# Altium PCB PCB.PcbDoc
Units mil, origin at the board's own origin, x right, y up, seen from the top; angles counter-clockwise.
Board outline 6000 x 4000 mil, 2 copper layers (Top Layer, Bottom Layer); 223 components, 0 nets, 802 pads, 0 vias.
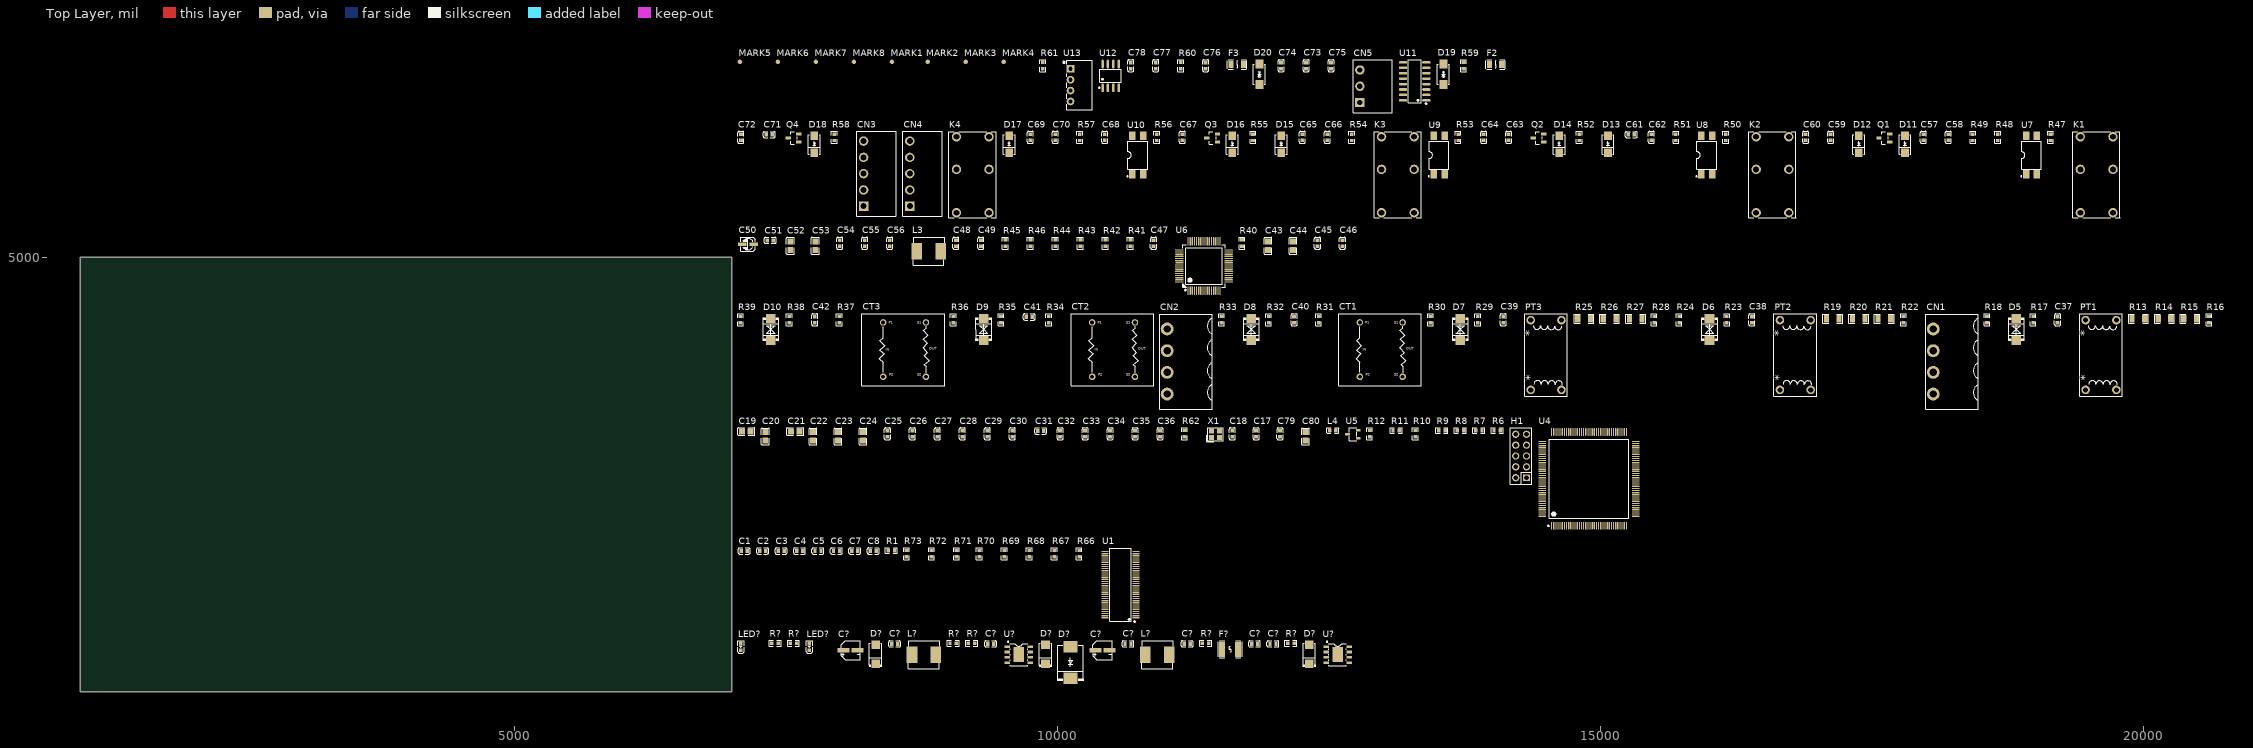
[diagram p0: Top Layer view]
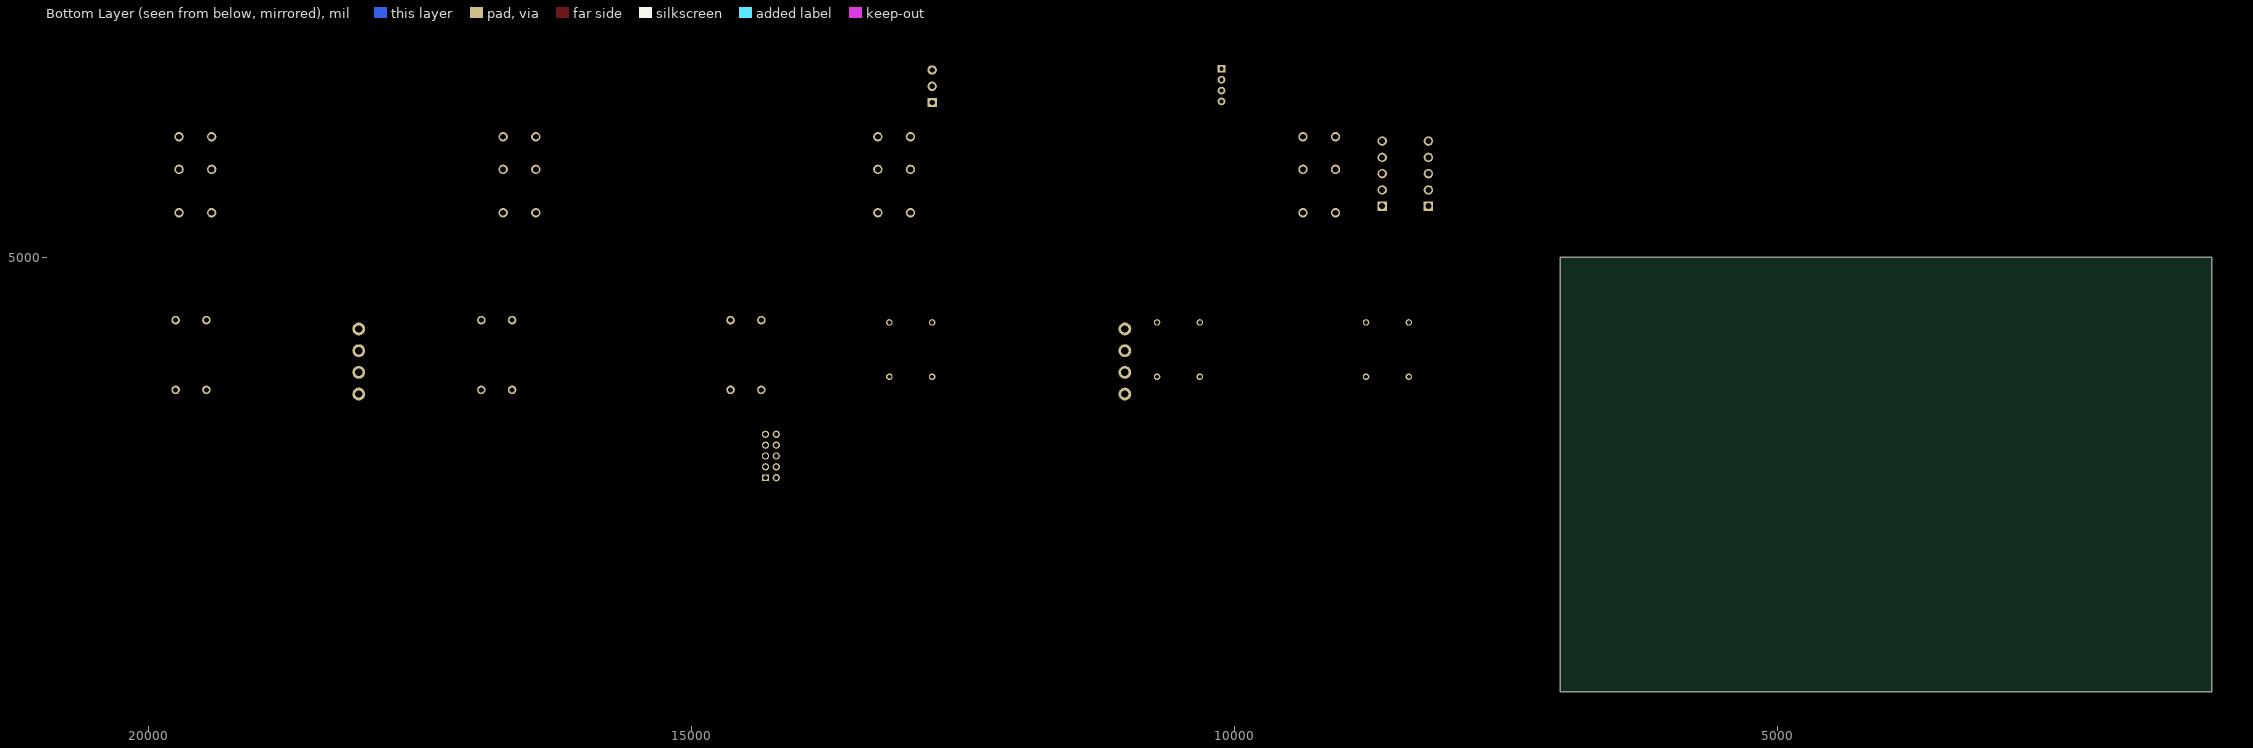
[diagram p1: Bottom Layer view, seen from below]

## Layer stack, top to bottom
Top Solder: solder mask 0.4, Solder Resist, Dk 3.5
Top Layer: signal copper 1.4
Dielectric 1: dielectric 12.6, FR-4, Dk 4.8
Bottom Layer: signal copper 1.4
Bottom Solder: solder mask 0.4, Solder Resist, Dk 3.5

## Board outline
1000,1000 7000,1000 7000,5000 1000,5000

## Design rules (kind name [scope] priority, off if disabled: settings)
Clearance [All] p1: gap=10 ignorepadtopadclearanceinfootprint=FALSE
PolygonConnect [All] p1: connectstyle=Relief reliefconductorwidth=10 reliefentries=4 polygonreliefangle="90 Angle" airgapwidth=10
RoutingVias [All] p1: holewidth=28 width=50 viastyle="Through Hole" minholewidth=28 minwidth=50 maxholewidth=28 maxwidth=50
SolderMaskExpansion [All] p1: expansion=4 istentingtop=FALSE
SupplyNets "Schematic Supply Nets_5" [InNet('+3.3V')] p1: voltage=0.000
SupplyNets "Schematic Supply Nets_4" [InNet('ISO_GND')] p2: voltage=0.000
SupplyNets "Schematic Supply Nets_3" [InNet('GND')] p3: voltage=0.000
SupplyNets "Schematic Supply Nets_2" [InNet('+5V')] p4: voltage=0.000
SupplyNets "Schematic Supply Nets_1" [InNet('AVDD5V')] p5: voltage=0.000
SupplyNets "Schematic Supply Nets" [InNet('ISO_VCC')] p6: voltage=0.000
Width [All] p1: maxlimit=10 minlimit=10 preferedwidth=10
30 further rules are at their usual default settings.

## Components (designator, comment, footprint, x,y, rotation, side; value= is the part's Value field where it differs from the comment)
C1 "100nF" C0603 7115,2295 r0 top
C2 "100nF" C0603 7285,2295 r0 top
C3 "100nF" C0603 7455,2295 r0 top
C4 "100nF" C0603 7625,2295 r0 top
C5 "100nF" C0603 7795,2295 r0 top
C6 "100nF" C0603 7965,2295 r0 top
C7 "100nF" C0603 8135,2295 r0 top
C8 "100nF" C0603 8305,2295 r0 top
C17 "100nF" C0603 11830,3375 r90 top
C18 "100nF" C0603 11610,3375 r90 top
C19 "10uF" C0805 7135,3395 r0 top
C20 "10uF" C0805 7310,3350 r90 top
C21 "10uF" C0805 7585,3395 r0 top
C22 "10uF" C0805 7750,3350 r90 top
C23 "10uF" C0805 7980,3350 r90 top
C24 "10uF" C0805 8210,3350 r90 top
C25 "100nF" C0603 8435,3375 r90 top
C26 "100nF" C0603 8665,3375 r90 top
C27 "100nF" C0603 8895,3375 r90 top
C28 "100nF" C0603 9125,3375 r90 top
C29 "100nF" C0603 9355,3375 r90 top
C30 "100nF" C0603 9585,3375 r90 top
C31 "100nF" C0603 9845,3400 r0 top
C32 "100nF" C0603 10025,3375 r90 top
C33 "100nF" C0603 10255,3375 r90 top
C34 "100nF" C0603 10485,3375 r90 top
C35 "100nF" C0603 10715,3375 r90 top
C36 "100nF" C0603 10945,3375 r90 top
C37 "10nF" C0603 19210,4425 r90 top
C38 "10nF" C0603 16395,4425 r90 top
C39 "10nF" C0603 14105,4425 r90 top
C40 "10nF" C0603 12180,4425 r90 top
C41 "10nF" C0603 9740,4450 r0 top
C42 "10nF" C0603 7765,4425 r90 top
C43 "10uF" C0805 11940,5105 r90 top
C44 "10uF" C0805 12170,5105 r90 top
C45 "1uF" C0603 12395,5130 r90 top
C46 "1uF" C0603 12625,5130 r90 top
C47 "100nF" C0603 10885,5130 r90 top
C48 "1nF" C0603 9065,5130 r90 top
C49 "1nF" C0603 9295,5130 r90 top
C50 "10uF" C_Ele_SMD_3x5.4mm 7150,5120 r0 top
C51 "100nF" C0603 7355,5155 r0 top
C52 "10uF" C0805 7540,5105 r90 top
C53 "10uF" C0805 7770,5105 r90 top
C54 "100nF" C0603 7995,5130 r90 top
C55 "100nF" C0603 8225,5130 r90 top
C56 "100nF" C0603 8455,5130 r90 top
C57 "100nF" C0603 17975,6105 r90 top
C58 "100nF" C0603 18205,6105 r90 top
C59 "100nF" C0603 17120,6105 r90 top
C60 "100nF" C0603 16890,6105 r90 top
C61 "100nF" C0603 15285,6130 r0 top
C62 "100nF" C0603 15470,6105 r90 top
C63 "100nF" C0603 14155,6105 r90 top
C64 "100nF" C0603 13925,6105 r90 top
C65 "100nF" C0603 12255,6105 r90 top
C66 "100nF" C0603 12485,6105 r90 top
C67 "100nF" C0603 11150,6105 r90 top
C68 "100nF" C0603 10435,6105 r90 top
C69 "100nF" C0603 9750,6105 r90 top
C70 "100nF" C0603 9980,6105 r90 top
C71 "100nF" C0603 7345,6130 r0 top
C72 "100nF" C0603 7085,6105 r90 top
C73 "100nF" C0603 12290,6765 r90 top
C74 "100nF" C0603 12060,6765 r90 top
C75 "100nF" C0603 12520,6765 r90 top
C76 "100nF" C0603 11365,6765 r90 top
C77 "100nF" C0603 10905,6765 r90 top
C78 "100nF" C0603 10675,6765 r90 top
C79 "100nF" C0603 12050,3375 r90 top
C80 "10uF" C0805 12285,3350 r90 top
C? "100nF" C0603 10650,1440 r0 top
C? "4.7uF" C0603 11815,1440 r0 top
C? "100nF" C0603 11985,1440 r0 top
C? "220uF" C_Ele_SMD_4x5.5mm 10410,1380 r0 top
C? "100nF" C0603 8500,1440 r0 top
C? "10nF" C0603 9385,1440 r0 top
C? "220uF" C_Ele_SMD_4x5.5mm 8090,1380 r0 top
C? "10nF" C0603 11195,1440 r0 top
CN1 "WJ2EDGRC-5.08-4P" CONN-TH_4P-P5.08_WJ2EDGRC-5.08-4P 18065,4040 r90 top
CN2 "WJ2EDGRC-5.08-4P" CONN-TH_4P-P5.08_WJ2EDGRC-5.08-4P 11010,4040 r90 top
CN3 "WJ15EDGRC-3.81-5P" CONN-TH_5P-P3.81_WJ15EDGRC-3.81-5P 8215,5770 r90 top
CN4 "WJ15EDGRC-3.81-5P" CONN-TH_5P-P3.81_WJ15EDGRC-3.81-5P 8640,5770 r90 top
CN5 "WJ15EDGRC-3.81-3P" CONN-TH_3P-P3.81_WJ15EDGRC-3.81-3P 12785,6575 r90 top
CT1 "DL-CT21C" DL-CT21C 12785,3900 r0 top
CT2 "DL-CT21C" DL-CT21C 10320,3900 r0 top
CT3 "DL-CT21C" DL-CT21C 8395,3900 r0 top
D5 "SMBJ12CA" SMB_L4.6-W3.6-LS5.3-BI 18830,4335 r90 top
D6 "SMBJ12CA" SMB_L4.6-W3.6-LS5.3-BI 16005,4335 r90 top
D7 "SMBJ12CA" SMB_L4.6-W3.6-LS5.3-BI 13710,4335 r90 top
D8 "SMBJ12CA" SMB_L4.6-W3.6-LS5.3-BI 11785,4335 r90 top
D9 "SMBJ12CA" SMB_L4.6-W3.6-LS5.3-BI 9320,4335 r90 top
D10 "SMBJ12CA" SMB_L4.6-W3.6-LS5.3-BI 7360,4335 r90 top
D11 "1N4007G" SMA_L4.4-W2.6-LS5.0-RD 17805,6040 r90 top
D12 "1N4007G" SMA_L4.4-W2.6-LS5.0-RD 17380,6040 r90 top
D13 "1N4007G" SMA_L4.4-W2.6-LS5.0-RD 15070,6040 r90 top
D14 "1N4007G" SMA_L4.4-W2.6-LS5.0-RD 14620,6040 r90 top
D15 "1N4007G" SMA_L4.4-W2.6-LS5.0-RD 12060,6040 r90 top
D16 "1N4007G" SMA_L4.4-W2.6-LS5.0-RD 11610,6040 r90 top
D17 "1N4007G" SMA_L4.4-W2.6-LS5.0-RD 9555,6040 r90 top
D18 "1N4007G" SMA_L4.4-W2.6-LS5.0-RD 7760,6040 r90 top
D19 "SMAJ15CA-E3/61" SMA_L4.3-W2.7-LS5.1-BI 13555,6685 r90 top
D20 "SMAJ15CA-E3/61" SMA_L4.3-W2.7-LS5.1-BI 11860,6685 r90 top
D? "SMDJ36A" SMC_L6.9-W5.9-LS7.9-RD 10120,1270 r90 top
D? "B340A" SMA_L4.3-W2.6-LS5.2-RD 8325,1345 r90 top
D? "B340A" SMA_L4.3-W2.6-LS5.2-RD 12320,1345 r90 top
D? "B340A" SMA_L4.3-W2.6-LS5.2-RD 9890,1345 r90 top
F2 "JK-NSMD050-30V" F1206 14035,6775 r0 top
F3 "JK-NSMD050-30V" F1206 11655,6775 r0 top
F? "mSMD050-60V" F1812 11590,1390 r0 top
H1 "" HDR-TH_10P-P2.54-V-F-R2-C5-S2.54 14270,3170 r90 top
K1 "DSP2A-DC5V" RELAY-TH_DSP2A-DC5V 19570,5760 r90 top
K2 "DSP2A-DC5V" RELAY-TH_DSP2A-DC5V 16585,5760 r90 top
K3 "DSP2A-DC5V" RELAY-TH_DSP2A-DC5V 13135,5760 r90 top
K4 "DSP2A-DC5V" RELAY-TH_DSP2A-DC5V 9220,5760 r90 top
L3 "15uH" IND-SMD_L7.1-W6.6_SLO0618H 8815,5055 r0 top
L4 "BLM18PG121SN1D" L0603 12535,3405 r0 top
L? "15uH" IND-SMD_L7.1-W6.6_SLO0618H 8770,1340 r0 top
L? "15uH" IND-SMD_L7.1-W6.6_SLO0618H 10920,1340 r0 top
LED? "" LED_0603 7085,1415 r90 top
LED? "" LED_0603 7715,1415 r90 top
MARK1 "" Mark-Point-1mm 8475,6800 r90 top
MARK2 "" Mark-Point-1mm 8805,6800 r90 top
MARK3 "" Mark-Point-1mm 9155,6800 r90 top
MARK4 "" Mark-Point-1mm 9505,6800 r90 top
MARK5 "" Mark-Point-1mm 7075,6800 r90 top
MARK6 "" Mark-Point-1mm 7425,6800 r90 top
MARK7 "" Mark-Point-1mm 7775,6800 r90 top
MARK8 "" Mark-Point-1mm 8125,6800 r90 top
PT1 "ZMPT107-1" XFMR-TH_ZMPT107-1 19610,4100 r90 top
PT2 "ZMPT107-1" XFMR-TH_ZMPT107-1 16795,4100 r90 top
PT3 "ZMPT107-1" XFMR-TH_ZMPT107-1 14500,4100 r90 top
Q1 "2N3904(SOT-23)" SOT-23-3_L2.9-W1.3-P1.90-LS2.4-TR 17615,6100 r0 top
Q2 "2N3904(SOT-23)" SOT-23-3_L2.9-W1.3-P1.90-LS2.4-TR 14430,6100 r0 top
Q3 "2N3904(SOT-23)" SOT-23-3_L2.9-W1.3-P1.90-LS2.4-TR 11425,6100 r0 top
Q4 "2N3904(SOT-23)" SOT-23-3_L2.9-W1.3-P1.90-LS2.4-TR 7570,6100 r0 top
R1 "4.7K" R0603 8470,2300 r0 top
R6 "100Ω" R0603 14050,3405 r0 top
R7 "100Ω" R0603 13880,3405 r0 top
R8 "100Ω" R0603 13710,3405 r0 top
R9 "100Ω" R0603 13540,3405 r0 top
R10 "4.7K" R0603 13295,3375 r90 top
R11 "4.7K" R0603 13120,3405 r0 top
R12 "4.7K" R0603 12875,3375 r90 top
R13 "100K" R1206 19955,4435 r0 top
R14 "100K" R1206 20195,4435 r0 top
R15 "100K" R1206 20430,4435 r0 top
R16 "1K" R0603 20605,4425 r90 top
R17 "2K" R0603 18985,4425 r90 top
R18 "1K" R0603 18560,4425 r90 top
R19 "100K" R1206 17140,4435 r0 top
R20 "100K" R1206 17380,4435 r0 top
R21 "100K" R1206 17615,4435 r0 top
R22 "1K" R0603 17790,4425 r90 top
R23 "2K" R0603 16165,4425 r90 top
R24 "1K" R0603 15725,4425 r90 top
R25 "100K" R1206 14850,4435 r0 top
R26 "100K" R1206 15085,4435 r0 top
R27 "100K" R1206 15325,4435 r0 top
R28 "1K" R0603 15495,4425 r90 top
R29 "2K" R0603 13870,4425 r90 top
R30 "1K" R0603 13435,4425 r90 top
R31 "1K" R0603 12405,4425 r90 top
R32 "500Ω" R0603 11945,4425 r90 top
R33 "1K" R0603 11510,4425 r90 top
R34 "1K" R0603 9920,4425 r90 top
R35 "500Ω" R0603 9480,4425 r90 top
R36 "1K" R0603 9040,4425 r90 top
R37 "1K" R0603 7990,4425 r90 top
R38 "500Ω" R0603 7530,4425 r90 top
R39 "1K" R0603 7080,4425 r90 top
R40 "1K" R0603 11700,5130 r90 top
R41 "1K" R0603 10670,5130 r90 top
R42 "1K" R0603 10440,5130 r90 top
R43 "1K" R0603 10210,5130 r90 top
R44 "1K" R0603 9980,5130 r90 top
R45 "1K" R0603 9520,5130 r90 top
R46 "1K" R0603 9750,5130 r90 top
R47 "2K" R0603 19145,6105 r90 top
R48 "5.1K" R0603 18660,6105 r90 top
R49 "330Ω" R0603 18430,6105 r90 top
R50 "2K" R0603 16155,6105 r90 top
R51 "5.1K" R0603 15695,6105 r90 top
R52 "330Ω" R0603 14805,6105 r90 top
R53 "2K" R0603 13690,6105 r90 top
R54 "5.1K" R0603 12710,6105 r90 top
R55 "330Ω" R0603 11800,6105 r90 top
R56 "2K" R0603 10915,6105 r90 top
R57 "5.1K" R0603 10205,6105 r90 top
R58 "330Ω" R0603 7945,6105 r90 top
R59 "33Ω" R0603 13740,6765 r90 top
R60 "33Ω" R0603 11135,6765 r90 top
R61 "DNP" R0603 9865,6765 r90 top
R62 "22Ω" R0603 11170,3375 r90 top
R66 "22Ω" R0603 10200,2270 r90 top
R67 "22Ω" R0603 9970,2270 r90 top
R68 "22Ω" R0603 9740,2270 r90 top
R69 "22Ω" R0603 9510,2270 r90 top
R70 "22Ω" R0603 9280,2270 r90 top
R71 "22Ω" R0603 9070,2270 r90 top
R72 "22Ω" R0603 8840,2270 r90 top
R73 "22Ω" R0603 8610,2270 r90 top
R? "3.24K" R0603 12150,1445 r0 top
R? "10K" R0603 11365,1445 r0 top
R? "1K" R0603 7400,1445 r0 top
R? "5.9K" R0603 9210,1445 r0 top
R? "1K" R0603 7570,1445 r0 top
R? "10K" R0603 9040,1445 r0 top
U1 "SN65MLVD080DGGR" TSSOP-64_L17.0-W6.1-P0.50-LS8.1-BL 10580,1985 r90 top
U4 "EPM570T144C3" TQFP-144_L20.0-W20.0-P0.50-LS22.0-BL 14895,2960 r0 top
U5 "IMP809ZEUR/T" SOT-23-3_L2.9-W1.6-P1.90-LS2.8-BR 12720,3370 r0 top
U6 "AD7606BSTZ" LQFP-64_L10.0-W10.0-P0.50-LS12.0-BL 11350,4920 r0 top
U7 "FOD817DSD" SMD-4_L4.6-W6.4-P2.54-LS10.0-BL 18970,5940 r0 top
U8 "FOD817DSD" SMD-4_L4.6-W6.4-P2.54-LS10.0-BL 15980,5940 r0 top
U9 "FOD817DSD" SMD-4_L4.6-W6.4-P2.54-LS10.0-BL 13515,5940 r0 top
U10 "FOD817DSD" SMD-4_L4.6-W6.4-P2.54-LS10.0-BL 10740,5940 r0 top
U11 "MAX3232ID" SOIC-16_L9.9-W3.9-P1.27-LS6.0-BL 13290,6620 r90 top
U12 "ADUM1201ARZ-RL7" SOIC-8_L4.9-W3.9-P1.27-LS6.0-BL 10490,6670 r0 top
U13 "B0505S-1WR2" PWRM-TH_BXXXXS-1WR2 10120,6585 r90 top
U? "TPS5430DDAR" ESOP-8_L4.9-W3.9-P1.27-LS6.0-TL-EP 12580,1340 r0 top
U? "TPS5430DDAR" ESOP-8_L4.9-W3.9-P1.27-LS6.0-TL-EP 9645,1340 r0 top
X1 "25MHz" OSC-SMD_4P-L2.5-W2.0-BL 11455,3370 r0 top

## Footprints (in the part's own frame and the unit in brackets; to place one, negate y for a bottom-side part, rotate by r counter-clockwise, add the part's x,y. Pads: shape width x height; smd on the part's side, far side on the other; paste and mask are expansions set on the pad)
C0603 [mm]
  rect 0.8x0.9 smd: 1(-0.7,0) 2(0.7,0)
  silkscreen extent -1.41,-0.71 1.39,0.72
C0805 [mm]
  rect 1.41x1.35 smd paste-100 mask+0.051: 1(-1,0) 2(1,0)
  silkscreen extent -1.96,-0.9 1.96,0.9
C_Ele_SMD_3x5.4mm [mil]
  rect 78.7x31.5 smd paste+0 mask+2: 1(54.1,-0.55) 2(-53.7,-0.55)
  silkscreen extent -65,-65 65,65
C_Ele_SMD_4x5.5mm [mm]
  rect 2.8x1.1 smd paste+0 mask+0.051: 1(-1.543,0) 2(1.778,0)
  silkscreen extent -2.1,-2.23 2.35,2.23
CONN-TH_3P-P3.81_WJ15EDGRC-3.81-3P [mm]
  rect 2.2x2.2 hole 1.26: 1(-3.81,0)
  round 2.2 hole 1.26: 2(0,0) 3(3.81,0)
  silkscreen extent -6.15,-7.55 6.15,1.6
CONN-TH_4P-P5.08_WJ2EDGRC-5.08-4P [mm]
  round 3 hole 1.7: 1(-7.62,0) 2(-2.54,0) 3(2.54,0) 4(7.62,0)
  silkscreen extent -11.11,-10.5 11.11,1.7
CONN-TH_5P-P3.81_WJ15EDGRC-3.81-5P [mm]
  rect 2.2x2.2 hole 1.4: 1(-7.62,0)
  round 2.2 hole 1.4: 2(-3.81,0) 3(0,0) 4(3.81,0) 5(7.62,0)
  silkscreen extent -9.91,-7.62 9.91,1.6
DL-CT21C [mil]
  round 60 hole 36: 1(0,500) 2(0,0) 3(393.7,500) 4(393.7,0)
  silkscreen extent -195,-81 565,580
ESOP-8_L4.9-W3.9-P1.27-LS6.0-TL-EP [mm]
  rect 1.3x0.6 smd: 1(-2.7,1.905) 2(-2.7,0.635) 3(-2.7,-0.635) 4(-2.7,-1.905) 5(2.7,-1.905) 6(2.7,-0.635) 7(2.7,0.635) 8(2.7,1.905)
  rect 2.5x3.5 smd: 9(0,0)
  silkscreen extent -2.67,-2.55 2.05,3.2
F1206 [mm]
  rect 1.19x1.728 smd: 1(-1.445,0) 2(1.445,0)
  silkscreen extent -2.27,-1.09 2.27,1.09
F1812 [mil]
  rect 55.38x137.76 smd paste-3937.01 mask+2: 1(-72.97,0) 2(72.97,0)
  silkscreen extent -110,-80 110,80
HDR-TH_10P-P2.54-V-F-R2-C5-S2.54 [mm]
  rect 1.575x1.7 hole 1.1: 1(-5.08,-1.27)
  round 1.7 hole 1.1: 2(-5.08,1.27) 3(-2.54,-1.27) 4(-2.54,1.27) 5(0,-1.27) 6(0,1.27) 7(2.54,-1.27) 8(2.54,1.27) 9(5.08,-1.27) 10(5.08,1.27)
  silkscreen extent -6.6,-2.54 6.6,2.54
IND-SMD_L7.1-W6.6_SLO0618H [mm]
  rect 2.5x3.8 smd: 1(-2.8,0) 2(2.8,0)
  silkscreen extent -3.68,-3.3 3.68,3.3
L0603 [mm]
  rect 0.8x0.864 smd paste-100 mask+0.051: 1(-0.7,0) 2(0.7,0)
  silkscreen extent -1.42,-0.65 1.42,0.65
LED_0603 [mil]
  rect 31.5x31.5 smd paste+0 mask+2: 1(-33.5,-0.4) 2(29.5,-0.2)
  silkscreen extent -61,-30 53,30
LQFP-64_L10.0-W10.0-P0.50-LS12.0-BL [mm]
  oval 0.3x2 smd: 1(-3.75,-5.75) 2(-3.25,-5.75) 3(-2.75,-5.75) 4(-2.25,-5.75) 5(-1.75,-5.75) 6(-1.25,-5.75) 7(-0.75,-5.75) 8(-0.25,-5.75) 9(0.25,-5.75) 10(0.75,-5.75) 11(1.25,-5.75) 12(1.75,-5.75) 13(2.25,-5.75) 14(2.75,-5.75) 15(3.25,-5.75) 16(3.75,-5.75) 33(3.75,5.75) 34(3.25,5.75) 35(2.75,5.75) 36(2.25,5.75) 37(1.75,5.75) 38(1.25,5.75) 39(0.75,5.75) 40(0.25,5.75) 41(-0.25,5.75) 42(-0.75,5.75) 43(-1.25,5.75) 44(-1.75,5.75) 45(-2.25,5.75) 46(-2.75,5.75) 47(-3.25,5.75) 48(-3.75,5.75)
  oval 2x0.3 smd: 17(5.75,-3.75) 18(5.75,-3.25) 19(5.75,-2.75) 20(5.75,-2.25) 21(5.75,-1.75) 22(5.75,-1.25) 23(5.75,-0.75) 24(5.75,-0.25) 25(5.75,0.25) 26(5.75,0.75) 27(5.75,1.25) 28(5.75,1.75) 29(5.75,2.25) 30(5.75,2.75) 31(5.75,3.25) 32(5.75,3.75) 49(-5.75,3.75) 50(-5.75,3.25) 51(-5.75,2.75) 52(-5.75,2.25) 53(-5.75,1.75) 54(-5.75,1.25) 55(-5.75,0.75) 56(-5.75,0.25) 57(-5.75,-0.25) 58(-5.75,-0.75) 59(-5.75,-1.25) 60(-5.75,-1.75) 61(-5.75,-2.25) 62(-5.75,-2.75) 63(-5.75,-3.25) 64(-5.75,-3.75)
  silkscreen extent -5,-5.79 5,5
Mark-Point-1mm [mm]
  round 1 smd paste-25.4 mask+0.051: 1(0,0)
OSC-SMD_4P-L2.5-W2.0-BL [mm]
  rect 1.2x1.1 smd: 1(-0.95,-0.75) 2(0.95,-0.75) 3(0.95,0.75) 4(-0.95,0.75)
  silkscreen extent -2.01,-1.76 1.78,1.53
PWRM-TH_BXXXXS-1WR2 [mm]
  rect 1.8x1.8 hole 1: 1(3.81,0)
  round 1.8 hole 1: 2(1.27,0) 3(-1.27,0) 4(-3.81,0)
  silkscreen extent -5.8,-5.1 5.8,1.72
R0603 [mil]
  rect 31.75x34.02 smd paste-3937.01 mask+2: 1(-29.66,0) 2(29.66,0)
  silkscreen extent -55,-26 55,26
R1206 [mil]
  rect 47.54x66.97 smd paste-3937.01 mask+2: 1(-58.22,0) 2(58.22,0)
  silkscreen extent -91,-42 91,42
RELAY-TH_DSP2A-DC5V [mm]
  round 2.2 hole 1.4: 1(-8.89,-3.81) 5(1.27,-3.81) 8(8.89,-3.81) 9(8.89,3.81) 12(1.27,3.81) 16(-8.89,3.81)
  silkscreen extent -10.11,-5.51 10.09,5.56
SMA_L4.3-W2.6-LS5.2-RD [mm]
  rect 2x2 smd: 1(-2.2,0) 2(2.2,0)
  silkscreen extent -2.98,-1.5 2.6,1.5
SMA_L4.3-W2.7-LS5.1-BI [mm]
  rect 2.1x1.8 smd: 1(-2.4,0) 2(2.4,0)
  silkscreen extent -2.3,-1.35 2.3,1.45
SMA_L4.4-W2.6-LS5.0-RD [mm]
  rect 2x1.8 smd paste+0 mask+0.102: 1(-2,0) 2(2,0)
  silkscreen extent -2.3,-1.4 2.3,1.4
SMB_L4.6-W3.6-LS5.3-BI [mil]
  rect 80.61x88.23 smd: 1(-102.02,0) 2(102.01,0)
  silkscreen extent -105,-75 108,75
SMC_L6.9-W5.9-LS7.9-RD [mm]
  rect 2.7x3.3 smd: 1(-3.686,0) 2(3.686,0)
  silkscreen extent -4.36,-3.1 3.98,3.1
SMD-4_L4.6-W6.4-P2.54-LS10.0-BL [mm]
  rect 1.5x2 smd: 1(-1.27,-4.5) 2(1.27,-4.5) 3(1.27,4.5) 4(-1.27,4.5)
  silkscreen extent -2.54,-5.08 2.3,3.3
SOIC-8_L4.9-W3.9-P1.27-LS6.0-BL [mm]
  oval 0.588x2.045 smd: 1(-1.905,-2.772) 2(-0.635,-2.772) 3(0.635,-2.772) 4(1.905,-2.772) 5(1.905,2.772) 6(0.635,2.772) 7(-0.635,2.772) 8(-1.905,2.772)
  silkscreen extent -2.8,-2.92 2.53,1.52
SOIC-16_L9.9-W3.9-P1.27-LS6.0-BL [mil]
  oval 23.7x77.6 smd: 1(-175,-107.7) 2(-125,-107.7) 3(-75,-107.7) 4(-25,-107.7) 5(25,-107.7) 6(75,-107.7) 7(125,-107.7) 8(175,-107.7) 9(175,107.7) 10(125,107.7) 11(75,107.7) 12(25,107.7) 13(-25,107.7) 14(-75,107.7) 15(-125,107.7) 16(-175,107.7)
  silkscreen extent -211,-111 198,60
SOT-23-3_L2.9-W1.3-P1.90-LS2.4-TR [mm]
  rect 1.25x0.7 smd: 1(1.25,0.95) 2(1.25,-0.95) 3(-1.25,0)
  silkscreen extent -0.65,-1.46 0.9,1.46
SOT-23-3_L2.9-W1.6-P1.90-LS2.8-BR [mm]
  rect 1.07x0.6 smd: 1(1.235,-0.95) 2(1.235,0.95) 3(-1.235,0)
  silkscreen extent -0.88,-1.54 0.88,1.54
TQFP-144_L20.0-W20.0-P0.50-LS22.0-BL [mm]
  oval 0.28x1.8 smd: 1(-8.75,-10.95) 2(-8.25,-10.95) 3(-7.75,-10.95) 4(-7.25,-10.95) 5(-6.75,-10.95) 6(-6.25,-10.95) 7(-5.75,-10.95) 8(-5.25,-10.95) 9(-4.75,-10.95) 10(-4.25,-10.95) 11(-3.75,-10.95) 12(-3.25,-10.95) 13(-2.75,-10.95) 14(-2.25,-10.95) 15(-1.75,-10.95) 16(-1.25,-10.95) 17(-0.75,-10.95) 18(-0.25,-10.95) 19(0.25,-10.95) 20(0.75,-10.95) 21(1.25,-10.95) 22(1.75,-10.95) 23(2.25,-10.95) 24(2.75,-10.95) 25(3.25,-10.95) 26(3.75,-10.95) 27(4.25,-10.95) 28(4.75,-10.95) 29(5.25,-10.95) 30(5.75,-10.95) 31(6.25,-10.95) 32(6.75,-10.95) 33(7.25,-10.95) 34(7.75,-10.95) 35(8.25,-10.95) 36(8.75,-10.95) 73(8.75,10.95) 74(8.25,10.95) 75(7.75,10.95) 76(7.25,10.95) 77(6.75,10.95) 78(6.25,10.95) 79(5.75,10.95) 80(5.25,10.95) 81(4.75,10.95) 82(4.25,10.95) 83(3.75,10.95) 84(3.25,10.95) 85(2.75,10.95) 86(2.25,10.95) 87(1.75,10.95) 88(1.25,10.95) 89(0.75,10.95) 90(0.25,10.95) 91(-0.25,10.95) 92(-0.75,10.95) 93(-1.25,10.95) 94(-1.75,10.95) 95(-2.25,10.95) 96(-2.75,10.95) 97(-3.25,10.95) 98(-3.75,10.95) 99(-4.25,10.95) 100(-4.75,10.95) 101(-5.25,10.95) 102(-5.75,10.95) 103(-6.25,10.95) 104(-6.75,10.95) 105(-7.25,10.95) 106(-7.75,10.95) 107(-8.25,10.95) 108(-8.75,10.95)
  oval 1.8x0.28 smd: 37(10.95,-8.75) 38(10.95,-8.25) 39(10.95,-7.75) 40(10.95,-7.25) 41(10.95,-6.75) 42(10.95,-6.25) 43(10.95,-5.75) 44(10.95,-5.25) 45(10.95,-4.75) 46(10.95,-4.25) 47(10.95,-3.75) 48(10.95,-3.25) 49(10.95,-2.75) 50(10.95,-2.25) 51(10.95,-1.75) 52(10.95,-1.25) 53(10.95,-0.75) 54(10.95,-0.25) 55(10.95,0.25) 56(10.95,0.75) 57(10.95,1.25) 58(10.95,1.75) 59(10.95,2.25) 60(10.95,2.75) 61(10.95,3.25) 62(10.95,3.75) 63(10.95,4.25) 64(10.95,4.75) 65(10.95,5.25) 66(10.95,5.75) 67(10.95,6.25) 68(10.95,6.75) 69(10.95,7.25) 70(10.95,7.75) 71(10.95,8.25) 72(10.95,8.75) 109(-10.95,8.75) 110(-10.95,8.25) 111(-10.95,7.75) 112(-10.95,7.25) 113(-10.95,6.75) 114(-10.95,6.25) 115(-10.95,5.75) 116(-10.95,5.25) 117(-10.95,4.75) 118(-10.95,4.25) 119(-10.95,3.75) 120(-10.95,3.25) 121(-10.95,2.75) 122(-10.95,2.25) 123(-10.95,1.75) 124(-10.95,1.25) 125(-10.95,0.75) 126(-10.95,0.25) 127(-10.95,-0.25) 128(-10.95,-0.75) 129(-10.95,-1.25) 130(-10.95,-1.75) 131(-10.95,-2.25) 132(-10.95,-2.75) 133(-10.95,-3.25) 134(-10.95,-3.75) 135(-10.95,-4.25) 136(-10.95,-4.75) 137(-10.95,-5.25) 138(-10.95,-5.75) 139(-10.95,-6.25) 140(-10.95,-6.75) 141(-10.95,-7.25) 142(-10.95,-7.75) 143(-10.95,-8.25) 144(-10.95,-8.75)
  silkscreen extent -9.65,-11.15 9.25,9.25
TSSOP-64_L17.0-W6.1-P0.50-LS8.1-BL [mm]
  oval 0.28x1.67 smd: 1(-7.75,-3.63) 2(-7.25,-3.63) 3(-6.75,-3.63) 4(-6.25,-3.63) 5(-5.75,-3.63) 6(-5.25,-3.63) 7(-4.75,-3.63) 8(-4.25,-3.63) 9(-3.75,-3.63) 10(-3.25,-3.63) 11(-2.75,-3.63) 12(-2.25,-3.63) 13(-1.75,-3.63) 14(-1.25,-3.63) 15(-0.75,-3.63) 16(-0.25,-3.63) 17(0.25,-3.63) 18(0.75,-3.63) 19(1.25,-3.63) 20(1.75,-3.63) 21(2.25,-3.63) 22(2.75,-3.63) 23(3.25,-3.63) 24(3.75,-3.63) 25(4.25,-3.63) 26(4.75,-3.63) 27(5.25,-3.63) 28(5.75,-3.63) 29(6.25,-3.63) 30(6.75,-3.63) 31(7.25,-3.63) 32(7.75,-3.63) 33(7.75,3.63) 34(7.25,3.63) 35(6.75,3.63) 36(6.25,3.63) 37(5.75,3.63) 38(5.25,3.63) 39(4.75,3.63) 40(4.25,3.63) 41(3.75,3.63) 42(3.25,3.63) 43(2.75,3.63) 44(2.25,3.63) 45(1.75,3.63) 46(1.25,3.63) 47(0.75,3.63) 48(0.25,3.63) 49(-0.25,3.63) 50(-0.75,3.63) 51(-1.25,3.63) 52(-1.75,3.63) 53(-2.25,3.63) 54(-2.75,3.63) 55(-3.25,3.63) 56(-3.75,3.63) 57(-4.25,3.63) 58(-4.75,3.63) 59(-5.25,3.63) 60(-5.75,3.63) 61(-6.25,3.63) 62(-6.75,3.63) 63(-7.25,3.63) 64(-7.75,3.63)
  silkscreen extent -8.79,-3.45 8.58,2.49
XFMR-TH_ZMPT107-1 [mm]
  round 2 hole 1.2: 1(-8.15,3.6) 2(-8.15,-3.6) 3(8.15,3.6) 4(8.15,-3.6)
  silkscreen extent -9.6,-5 9.6,5

## Part data
C1 C2 C3 C4 C5 C6 C7 C8 C17 C18 C25 C26 C27 C28 C29 C30 C31 C32 C33 C34 C35 C36 C37 C38 C39 C40 C41 C42 C45 C46 C47 C48 C49 C51 C54 C55 C56 C57 C58 C59 C60 C61 C62 C63 C64 C65 C66 C67 C68 C69 C70 C71 C72 C73 C74 C75 C76 C77 C78 C79 C? C? C? C? C? C?: library part CAP_0603, Device=CAP_0603
C19 C20 C21 C22 C23 C24 C43 C44 C52 C53 C80: library part CAP_0805, Device=CAP_0805
C50: library part C_Ele_SMD_3x5.4mm, Device=C_Ele_SMD_3x5.4mm
C? C?: library part C_Ele_SMD_4x5.5mm, Device=C_Ele_SMD_4x5.5mm
H1: library part HDR-F_2.54_2x5, Device=HDR-F_2.54_2x5
L3 L? L?: library part SLO0630H150MTT, Device=SLO0630H150MTT
LED? LED?: library part LED_0603-R, Device=LED_0603-R
MARK1 MARK2 MARK3 MARK4 MARK5 MARK6 MARK7 MARK8: library part Mark-Point, Device=Mark-Point
PT1 PT2 PT3: library part ZMPT107-1_C125191, Device=ZMPT107-1_C125191
Q1 Q2 Q3 Q4: library part 2n3904S-RTK/PS, Device=2n3904S-RTK/PS
R1 R6 R7 R8 R9 R10 R11 R12 R16 R17 R18 R22 R23 R24 R28 R29 R30 R31 R32 R33 R34 R35 R36 R37 R38 R39 R40 R41 R42 R43 R44 R45 R46 R47 R48 R49 R50 R51 R52 R53 R54 R55 R56 R57 R58 R59 R60 R61 R62 R66 R67 R68 R69 R70 R71 R72 R73 R? R? R? R? R? R?: library part Res_0603, Device=Res_0603
R13 R14 R15 R19 R20 R21 R25 R26 R27: library part Res_1206, Device=Res_1206
X1: library part X1G0041710033, Device=X1G0041710033
CN1 CN2: Device=WJ2EDGRC-5.08-4P
CN3 CN4: Device=WJ15EDGRC-3.81-5P
CN5: Device=WJ15EDGRC-3.81-3P
CT1 CT2 CT3: Device=DL-CT21C
D5 D6 D7 D8 D9 D10: Device=SMBJ12CA
D11 D12 D13 D14 D15 D16 D17 D18: Device=1N4007G
D19 D20: Device=SMAJ15CA-E3/61
D?: Device=SMDJ36A
D? D? D?: Device=B340A
F2 F3: Device=JK-NSMD050-30V
F?: Device=mSMD050-60V
K1 K2 K3 K4: Device=DSP2A-DC5V
L4: Device=BLM18PG121SN1D
U1: Device=SN65MLVD080DGGR
U4: Device=EPM570T144C3
U5: Device=IMP809ZEUR/T
U6: Device=AD7606BSTZ
U7 U8 U9 U10: Device=FOD817DSD
U11: Device=MAX3232ID
U12: Device=ADUM1201ARZ-RL7
U13: Device=B0505S-1WR2
U? U?: Device=TPS5430DDAR

## Nets (pads, with @x,y where several pads share a name; then routed paths per layer and width w, separated by ;. In a path a pad name is that pad's centre, name@x,y a point inside that pad or via, vN(x,y) a via of type N, cw(c..) or ccw(c..) an arc to the next point about the centre after c; other vN are vias at no path point)
pads on no net: C1.1 C1.2 C2.1 C2.2 C3.1 C3.2 C4.1 C4.2 C5.1 C5.2 C6.1 C6.2 C7.1 C7.2 C8.1 C8.2 C17.1 C17.2 C18.1 C18.2 C19.1 C19.2 C20.1 C20.2 C21.1 C21.2 C22.1 C22.2 C23.1 C23.2 C24.1 C24.2 C25.1 C25.2 C26.1 C26.2 C27.1 C27.2 C28.1 C28.2 C29.1 C29.2 C30.1 C30.2 C31.1 C31.2 C32.1 C32.2 C33.1 C33.2 C34.1 C34.2 C35.1 C35.2 C36.1 C36.2 C37.1 C37.2 C38.1 C38.2 C39.1 C39.2 C40.1 C40.2 C41.1 C41.2 C42.1 C42.2 C43.1 C43.2 C44.1 C44.2 C45.1 C45.2 C46.1 C46.2 C47.1 C47.2 C48.1 C48.2 C49.1 C49.2 C50.1 C50.2 C51.1 C51.2 C52.1 C52.2 C53.1 C53.2 C54.1 C54.2 C55.1 C55.2 C56.1 C56.2 C57.1 C57.2 C58.1 C58.2 C59.1 C59.2 C60.1 C60.2 C61.1 C61.2 C62.1 C62.2 C63.1 C63.2 C64.1 C64.2 C65.1 C65.2 C66.1 C66.2 C67.1 C67.2 C68.1 C68.2 C69.1 C69.2 C70.1 C70.2 C71.1 C71.2 C72.1 C72.2 C73.1 C73.2 C74.1 C74.2 C75.1 C75.2 C76.1 C76.2 C77.1 C77.2 C78.1 C78.2 C79.1 C79.2 C80.1 C80.2 C?.1 C?.2 CN1.1 CN1.2 CN1.3 CN1.4 CN2.1 CN2.2 CN2.3 CN2.4 CN3.1 CN3.2 CN3.3 CN3.4 CN3.5 CN4.1 CN4.2 CN4.3 CN4.4 CN4.5 CN5.1 CN5.2 CN5.3 CT1.1 CT1.2 CT1.3 CT1.4 CT2.1 CT2.2 CT2.3 CT2.4 CT3.1 CT3.2 CT3.3 CT3.4 D5.1 D5.2 D6.1 D6.2 D7.1 D7.2 D8.1 D8.2 D9.1 D9.2 D10.1 D10.2 D11.1 D11.2 D12.1 D12.2 D13.1 D13.2 D14.1 D14.2 D15.1 D15.2 D16.1 D16.2 D17.1 D17.2 D18.1 D18.2 D19.1 D19.2 D20.1 D20.2 D?.1 D?.2 F2.1 F2.2 F3.1 F3.2 F?.1 F?.2 H1.1 H1.2 H1.3 H1.4 H1.5 H1.6 H1.7 H1.8 H1.9 H1.10 K1.1 K1.5 K1.8 K1.9 K1.12 K1.16 K2.1 K2.5 K2.8 K2.9 K2.12 K2.16 K3.1 K3.5 K3.8 K3.9 K3.12 K3.16 K4.1 K4.5 K4.8 K4.9 K4.12 K4.16 L3.1 L3.2 L4.1 L4.2 L?.1 L?.2 LED?.1 LED?.2 MARK1.1 MARK2.1 MARK3.1 MARK4.1 MARK5.1 MARK6.1 MARK7.1 MARK8.1 PT1.1 PT1.2 PT1.3 PT1.4 PT2.1 PT2.2 PT2.3 PT2.4 PT3.1 PT3.2 PT3.3 PT3.4 Q1.1 Q1.2 Q1.3 Q2.1 Q2.2 Q2.3 Q3.1 Q3.2 Q3.3 Q4.1 Q4.2 Q4.3 R1.1 R1.2 R6.1 R6.2 R7.1 R7.2 R8.1 R8.2 R9.1 R9.2 R10.1 R10.2 R11.1 R11.2 R12.1 R12.2 R13.1 R13.2 R14.1 R14.2 R15.1 R15.2 R16.1 R16.2 R17.1 R17.2 R18.1 R18.2 R19.1 R19.2 R20.1 R20.2 R21.1 R21.2 R22.1 R22.2 R23.1 R23.2 R24.1 R24.2 R25.1 R25.2 R26.1 R26.2 R27.1 R27.2 R28.1 R28.2 R29.1 R29.2 R30.1 R30.2 R31.1 R31.2 R32.1 R32.2 R33.1 R33.2 R34.1 R34.2 R35.1 R35.2 R36.1 R36.2 R37.1 R37.2 R38.1 R38.2 R39.1 R39.2 R40.1 R40.2 R41.1 R41.2 R42.1 R42.2 R43.1 R43.2 R44.1 R44.2 R45.1 R45.2 R46.1 R46.2 R47.1 R47.2 R48.1 R48.2 R49.1 R49.2 R50.1 R50.2 R51.1 R51.2 R52.1 R52.2 R53.1 R53.2 R54.1 R54.2 R55.1 R55.2 R56.1 R56.2 R57.1 R57.2 R58.1 R58.2 R59.1 R59.2 R60.1 R60.2 R61.1 R61.2 R62.1 R62.2 R66.1 R66.2 R67.1 R67.2 R68.1 R68.2 R69.1 R69.2 R70.1 R70.2 R71.1 R71.2 R72.1 R72.2 R73.1 R73.2 R?.1 R?.2 U1.1 U1.2 U1.3 U1.4 U1.5 U1.6 U1.7 U1.8 U1.9 U1.10 U1.11 U1.12 U1.13 U1.14 U1.15 U1.16 U1.17 U1.18 U1.19 U1.20 U1.21 U1.22 U1.23 U1.24 U1.25 U1.26 U1.27 U1.28 U1.29 U1.30 U1.31 U1.32 U1.33 U1.34 U1.35 U1.36 U1.37 U1.38 U1.39 U1.40 U1.41 U1.42 U1.43 U1.44 U1.45 U1.46 U1.47 U1.48 U1.49 U1.50 U1.51 U1.52 U1.53 U1.54 U1.55 U1.56 U1.57 U1.58 U1.59 U1.60 U1.61 U1.62 U1.63 U1.64 U4.1 U4.2 U4.3 U4.4 U4.5 U4.6 U4.7 U4.8 U4.9 U4.10 U4.11 U4.12 U4.13 U4.14 U4.15 U4.16 U4.17 U4.18 U4.19 U4.20 U4.21 U4.22 U4.23 U4.24 U4.25 U4.26 U4.27 U4.28 U4.29 U4.30 U4.31 U4.32 U4.33 U4.34 U4.35 U4.36 U4.37 U4.38 U4.39 U4.40 U4.41 U4.42 U4.43 U4.44 U4.45 U4.46 U4.47 U4.48 U4.49 U4.50 U4.51 U4.52 U4.53 U4.54 U4.55 U4.56 U4.57 U4.58 U4.59 U4.60 U4.61 U4.62 U4.63 U4.64 U4.65 U4.66 U4.67 U4.68 U4.69 U4.70 U4.71 U4.72 U4.73 U4.74 U4.75 U4.76 U4.77 U4.78 U4.79 U4.80 U4.81 U4.82 U4.83 U4.84 U4.85 U4.86 U4.87 U4.88 U4.89 U4.90 U4.91 U4.92 U4.93 U4.94 U4.95 U4.96 U4.97 U4.98 U4.99 U4.100 U4.101 U4.102 U4.103 U4.104 U4.105 U4.106 U4.107 U4.108 U4.109 U4.110 U4.111 U4.112 U4.113 U4.114 U4.115 U4.116 U4.117 U4.118 U4.119 U4.120 U4.121 U4.122 U4.123 U4.124 U4.125 U4.126 U4.127 U4.128 U4.129 U4.130 U4.131 U4.132 U4.133 U4.134 U4.135 U4.136 U4.137 U4.138 U4.139 U4.140 U4.141 U4.142 U4.143 U4.144 U5.1 U5.2 U5.3 U6.1 U6.2 U6.3 U6.4 U6.5 U6.6 U6.7 U6.8 U6.9 U6.10 U6.11 U6.12 U6.13 U6.14 U6.15 U6.16 U6.17 U6.18 U6.19 U6.20 U6.21 U6.22 U6.23 U6.24 U6.25 U6.26 U6.27 U6.28 U6.29 U6.30 U6.31 U6.32 U6.33 U6.34 U6.35 U6.36 U6.37 U6.38 U6.39 U6.40 U6.41 U6.42 U6.43 U6.44 U6.45 U6.46 U6.47 U6.48 U6.49 U6.50 U6.51 U6.52 U6.53 U6.54 U6.55 U6.56 U6.57 U6.58 U6.59 U6.60 U6.61 U6.62 U6.63 U6.64 U7.1 U7.2 U7.3 U7.4 U8.1 U8.2 U8.3 U8.4 U9.1 U9.2 U9.3 U9.4 U10.1 U10.2 U10.3 U10.4 U11.1 U11.2 U11.3 U11.4 U11.5 U11.6 U11.7 U11.8 U11.9 U11.10 U11.11 U11.12 U11.13 U11.14 U11.15 U11.16 U12.1 U12.2 U12.3 U12.4 U12.5 U12.6 U12.7 U12.8 U13.1 U13.2 U13.3 U13.4 U?.1 U?.2 U?.3 U?.4 U?.5 U?.6 U?.7 U?.8 U?.9 X1.1 X1.2 X1.3 X1.4

## Text inside footprints (layer, text, board x,y; h text height)
CT1: Top Overlay "P1" at 12835,4380 h39.37; Top Overlay "S1" at 13100,4380 h39.37; Top Overlay "P2" at 12840,3900 h39.37; Top Overlay "S2" at 13100,3900 h39.37; Top Overlay "IN" at 12810,4130 h39.37; Top Overlay "OUT" at 13210,4140 h39.37
CT2: Top Overlay "P1" at 10370,4380 h39.37; Top Overlay "S1" at 10635,4380 h39.37; Top Overlay "P2" at 10375,3900 h39.37; Top Overlay "S2" at 10635,3900 h39.37; Top Overlay "IN" at 10345,4130 h39.37; Top Overlay "OUT" at 10745,4140 h39.37
CT3: Top Overlay "P1" at 8445,4380 h39.37; Top Overlay "S1" at 8710,4380 h39.37; Top Overlay "P2" at 8450,3900 h39.37; Top Overlay "S2" at 8710,3900 h39.37; Top Overlay "IN" at 8420,4130 h39.37; Top Overlay "OUT" at 8820,4140 h39.37
PT1: Top Overlay "*" at 19505.33,3863 h80 r90; Top Overlay "*" at 19500.33,4273 h80 r90
PT2: Top Overlay "*" at 16690.33,3863 h80 r90; Top Overlay "*" at 16685.33,4273 h80 r90
PT3: Top Overlay "*" at 14395.33,3863 h80 r90; Top Overlay "*" at 14390.33,4273 h80 r90